# Altium PCB LKS_DEMO_V5.0.PcbDoc (part 4 of 4)
Units mil, origin at the board's own origin, x right, y up, seen from the top; angles counter-clockwise.
Board outline 5414.8 x 3354.56 mil, 2 copper layers (Top Layer, Bottom Layer); 131 components, 85 nets, 355 pads, 272 vias.
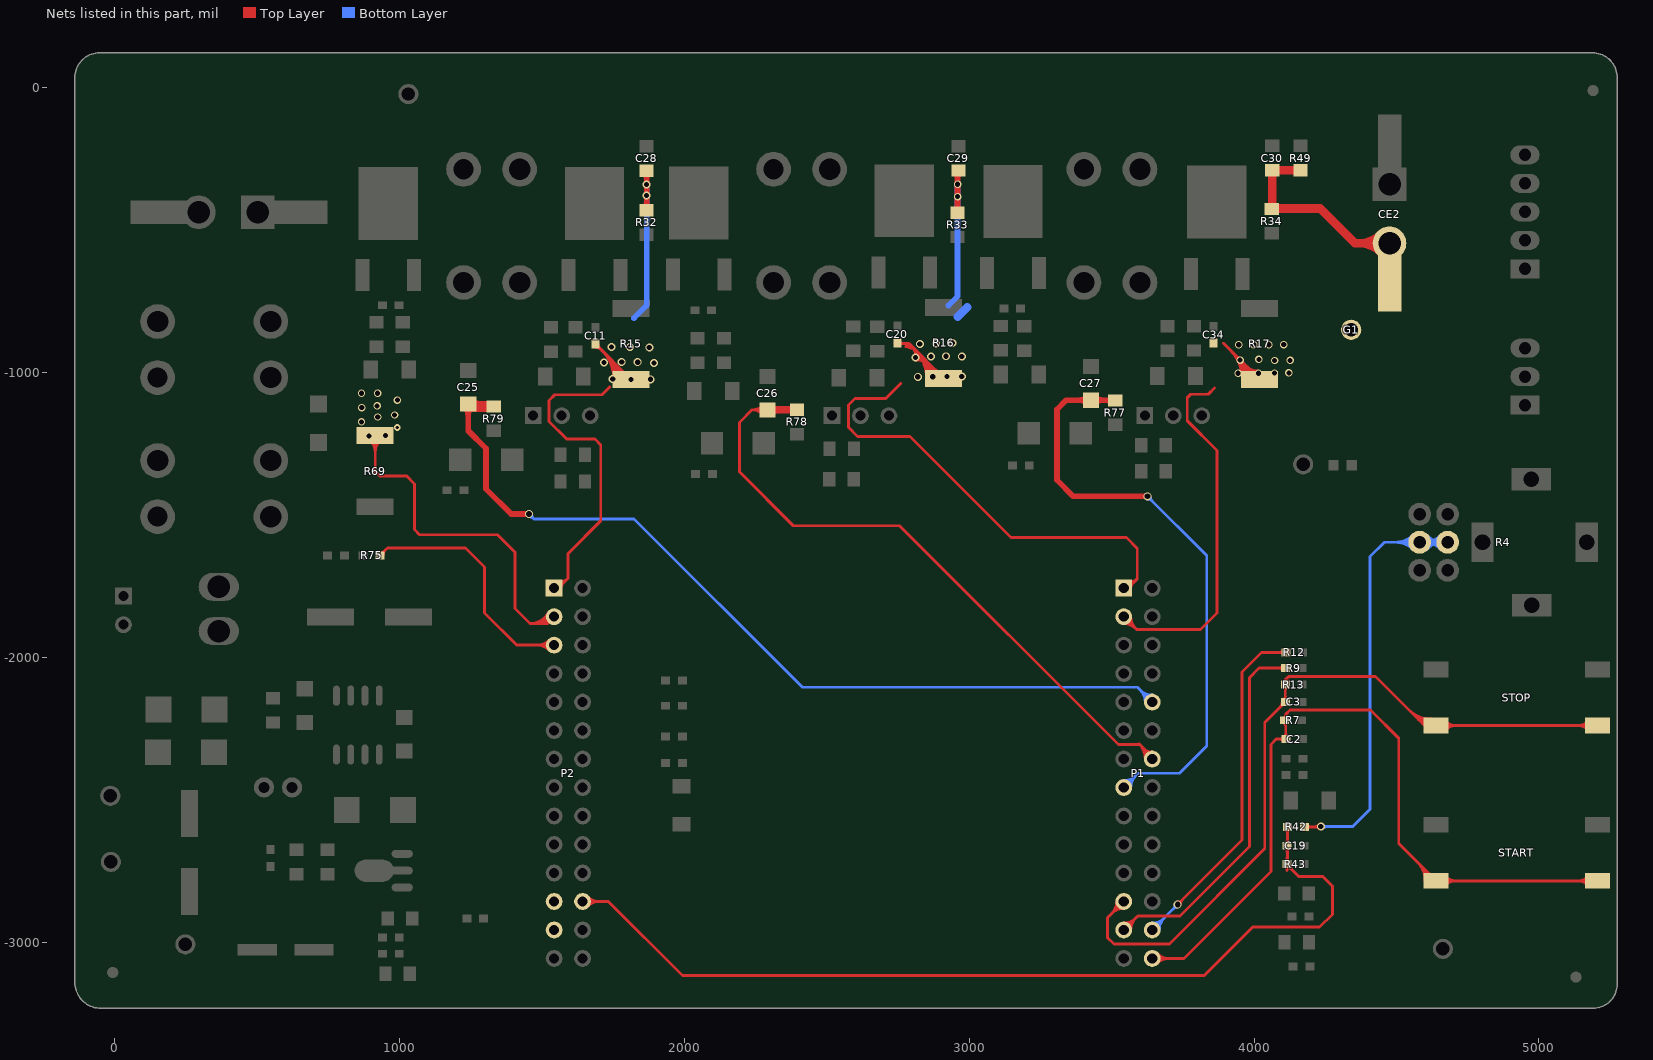
[diagram p4: the nets of this part, all layers, seen from the top]

## Via types
v1: diameter 26, hole 18, Top Layer to Bottom Layer, 117 vias
v2: diameter 28, hole 20, Top Layer to Bottom Layer, 77 vias
v3: diameter 28, hole 18, Top Layer to Bottom Layer, 73 vias
v4: diameter 23.62, hole 11.81, Top Layer to Bottom Layer, 5 vias

## Nets (pads, with @x,y where several pads share a name; then routed paths per layer and width w, separated by ;. In a path a pad name is that pad's centre, name@x,y a point inside that pad or via, vN(x,y) a via of type N, cw(c..) or ccw(c..) an arc to the next point about the centre after c; other vN are vias at no path point) (continued)
PGND: C11.2 C20.2 C28.1 C29.1 C30.1 C34.2 CE2.2 G1.1 P1.1 P1.2 P2.1 P2.2 R15.2 R16.1 R17.2 R32.1 R33.1 R34.1 R49.2 R69.1 | length 13563.9
  Top Layer w10: R69.1@914.27,-1220.9 914.27,-1347.89 930,-1363.63 1025.03,-1363.63 1052.09,-1390.69 1052.09,-1551.41 1070.11,-1569.43 1343.41,-1569.43 1404.57,-1630.58 1404.57,-1827.8 1457.84,-1881.07 1521.32,-1881.07 ; P2.1@1552.3,-1760.99 1590.81,-1722.48 ; C11.2@1686.48,-898.64 v3(1812.36,-1024.52) ; 1737.64,-1050.46 1710.19,-1077.91 1544.55,-1077.91 1524.89,-1097.56 1524.89,-1171.55 1586.49,-1233.15 1685.56,-1233.15 1706.23,-1253.82 1706.23,-1520.42 1590.81,-1635.84 1590.81,-1722.48 ; C20.2@2739.08,-898.48 2788.81,-898.48 R16.1@2909.76,-1019.43 ; 2759.24,-1038.12 2706.6,-1090.75 2598.05,-1090.75 2575.35,-1113.45 2575.35,-1191.92 2607.79,-1224.36 2791.94,-1224.36 3146.77,-1579.2 3551.29,-1579.2 3589.68,-1617.58 3589.68,-1723.64 ; P1.2@3542.25,-1856.82 3587.36,-1901.93 3812,-1901.93 3869.76,-1844.18 3869.76,-1273.79 3765.24,-1169.27 3765.24,-1088.38 3777.42,-1076.19 3838.74,-1076.19 3860.58,-1054.36 ; P1.1@3542.25,-1756.82 3556.5,-1756.82 3589.68,-1723.64 ; 3891.88,-896.92 R17.2@4018.89,-1023.93 ; 914.27,-1280.11 ccw(c855.06,-1280.11) 896.93,-1238.24 cw(c855.06,-1280.11) 914.27,-1280.11 ; 914.27,-1280.11 cw(c973.49,-1280.11) 931.61,-1238.24 ccw(c973.49,-1280.11) 914.27,-1280.11 ; 914.27,-1255.97 ccw(c879.2,-1255.97) 904,-1231.17 cw(c879.2,-1255.97) 914.27,-1255.97 ; 914.27,-1255.97 cw(c949.34,-1255.97) 924.54,-1231.17 ccw(c949.34,-1255.97) 914.27,-1255.97 ; 1590.81,-1722.49 cw(c1560.81,-1692.49) 1549.05,-1733.25 ccw(c1560.81,-1692.49) 1590.81,-1722.49 ; R15.2@1796.99,-1009.15 ccw(c1812.36,-993.79) 1812.36,-1015.52 cw(c1812.36,-993.79) R15.2@1796.99,-1009.15 ; R15.2@1796.99,-1009.15 cw(c1781.63,-1024.52) 1803.36,-1024.52 ccw(c1781.63,-1024.52) R15.2@1796.99,-1009.15 ; 2777.12,-901.14 ccw(c2799.64,-888.13) 2792.91,-913.25 ; 2777.12,-901.14 ccw(c2799.64,-888.13) 2792.91,-913.25 ; 2777.12,-901.14 ccw(c2799.64,-888.13) 2792.91,-913.25 ; 2778.18,-909.31 cw(c2778.18,-961.11) 2814.81,-924.48 ; 2778.18,-909.31 cw(c2778.18,-961.11) 2814.81,-924.48 ; 2778.18,-909.31 cw(c2778.18,-961.11) 2814.81,-924.48 ; 2778.18,-899.31 cw(c2778.18,-926.97) 2797.74,-907.41 ; 2778.18,-899.31 cw(c2778.18,-926.97) 2797.74,-907.41 ; 2778.18,-899.31 cw(c2778.18,-926.97) 2797.74,-907.41 ; 2778.25,-899.31 cw(c2776.95,-920.6) 2795.43,-909.93 ; 2778.25,-899.31 cw(c2776.95,-920.6) 2795.43,-909.93 ; 2778.25,-899.31 cw(c2776.95,-920.6) 2795.43,-909.93 ; 3567.05,-1881.62 ccw(c3542.25,-1906.42) 3542.25,-1871.34 cw(c3542.25,-1906.42) 3567.05,-1881.62 ; 3567.05,-1881.62 cw(c3591.85,-1856.82) 3556.78,-1856.82 ccw(c3591.85,-1856.82) 3567.05,-1881.62 ; 3584.12,-1898.69 ccw(c3542.25,-1940.56) 3542.25,-1881.34 cw(c3542.25,-1940.56) 3584.12,-1898.69 ; 3584.12,-1898.69 cw(c3625.99,-1856.82) 3566.78,-1856.82 ccw(c3625.99,-1856.82) 3584.12,-1898.69 ; 3589.67,-1723.64 cw(c3561.6,-1695.57) 3549.64,-1733.43 ccw(c3561.6,-1695.57) 3589.67,-1723.64 ; 1457.84,-1881.07 ccw(c1457.84,-1808.19) 1521,-1844.57 cw(c1457.84,-1808.19) 1457.84,-1881.07 ; 1475.14,-1881.07 ccw(c1475.14,-1818.16) 1529.66,-1849.56 cw(c1475.14,-1818.16) 1475.14,-1881.07 ; 1492.45,-1881.07 ccw(c1492.45,-1828.13) 1538.33,-1854.56 cw(c1492.45,-1828.13) 1492.45,-1881.07 ; 1509.75,-1881.07 ccw(c1509.75,-1838.09) 1546.99,-1859.55 cw(c1509.75,-1838.09) 1509.75,-1881.07 ; P2.1@1546.28,-1742.86 ccw(c1555.45,-1711.08) 1578.83,-1734.47 cw(c1555.45,-1711.08) P2.1@1546.28,-1742.86 ; P2.1@1566.78,-1756.82 cw(c1591.63,-1756.82) 1574.06,-1739.24 ccw(c1591.63,-1756.82) P2.1@1566.78,-1756.82 ; C11.2@1687.64,-911.18 cw(c1687.64,-938.66) 1707.07,-919.23 ccw(c1687.64,-938.66) C11.2@1687.64,-911.18 ; C11.2@1696.42,-902.4 ccw(c1711.33,-902.4) 1700.78,-912.94 cw(c1711.33,-902.4) C11.2@1696.42,-902.4 ; 1710,-922.16 cw(c1607.64,-1024.52) 1752.4,-1024.52 ccw(c1607.64,-1024.52) 1710,-922.16 ; 1727.07,-939.23 cw(c1641.78,-1024.52) 1762.4,-1024.52 ccw(c1641.78,-1024.52) 1727.07,-939.23 ; 1744.14,-956.3 cw(c1675.92,-1024.52) 1772.4,-1024.52 ccw(c1675.92,-1024.52) 1744.14,-956.3 ; 1761.21,-973.37 cw(c1710.07,-1024.52) 1782.4,-1024.52 ccw(c1710.07,-1024.52) 1761.21,-973.37 ; 1778.28,-990.44 cw(c1744.21,-1024.52) 1792.4,-1024.52 ccw(c1744.21,-1024.52) 1778.28,-990.44 ; C20.2@2753.73,-903.53 cw(c2765.92,-915.73) 2765.92,-898.48 ccw(c2765.92,-915.73) C20.2@2753.73,-903.53 ; C20.2@2753.73,-891.12 ccw(c2771.51,-873.34) 2771.51,-898.48 cw(c2771.51,-873.34) C20.2@2753.73,-891.12 ; 2794.48,-904.15 cw(c2751.96,-946.66) 2812.09,-946.66 ccw(c2751.96,-946.66) 2794.48,-904.15 ; 2806.96,-916.63 cw(c2702.58,-1021) 2850.19,-1021 ccw(c2702.58,-1021) 2806.96,-916.63 ; v3@2811.09,-955.66 cw(c2811.09,-1039.93) 2870.67,-980.34 ccw(c2811.09,-1039.93) v3@2811.09,-955.66 ; v3@2811.09,-945.66 cw(c2811.09,-1005.79) 2853.6,-963.27 ccw(c2811.09,-1005.79) v3@2811.09,-945.66 ; v3@2811.09,-935.66 cw(c2811.09,-971.65) 2836.53,-946.2 ccw(c2811.09,-971.65) v3@2811.09,-935.66 ; 2811.55,-921.22 cw(c2786.1,-946.66) 2822.09,-946.66 ccw(c2786.1,-946.66) 2811.55,-921.22 ; 2824.03,-933.7 cw(c2736.72,-1021) 2860.19,-1021 ccw(c2736.72,-1021) 2824.03,-933.7 ; 2841.1,-950.77 cw(c2770.87,-1021) 2870.19,-1021 ccw(c2770.87,-1021) 2841.1,-950.77 ; 2858.17,-967.84 cw(c2805.01,-1021) 2880.19,-1021 ccw(c2805.01,-1021) 2858.17,-967.84 ; 2875.24,-984.91 cw(c2839.15,-1021) 2890.19,-1021 ccw(c2839.15,-1021) 2875.24,-984.91 ; 2876.27,-985.94 ccw(c2921.84,-940.37) 2921.84,-1004.82 cw(c2921.84,-940.37) 2876.27,-985.94 ; R16.1@2893.34,-1003.01 ccw(c2921.84,-974.51) 2921.84,-1014.82 cw(c2921.84,-974.51) R16.1@2893.34,-1003.01 ; P1.1@3546.63,-1742.96 ccw(c3556.01,-1713.27) 3578.03,-1735.29 cw(c3556.01,-1713.27) P1.1@3546.63,-1742.96 ; P1.1@3566.78,-1756.82 cw(c3591.58,-1756.82) 3574.04,-1739.28 ccw(c3591.58,-1756.82) P1.1@3566.78,-1756.82 ; 3916.32,-921.36 cw(c3813.16,-1024.52) 3959.05,-1024.52 ccw(c3813.16,-1024.52) 3916.32,-921.36 ; 3933.39,-938.43 cw(c3847.31,-1024.52) 3969.05,-1024.52 ccw(c3847.31,-1024.52) 3933.39,-938.43 ; 3936.81,-941.84 cw(c3922.35,-956.3) 3942.8,-956.3 ccw(c3922.35,-956.3) 3936.81,-941.84 ; 3937.94,-942.97 ccw(c3950.8,-930.11) 3950.8,-948.3 cw(c3950.8,-930.11) 3937.94,-942.97 ; v1@3950.47,-955.5 cw(c3881.45,-1024.52) 3979.05,-1024.52 ccw(c3881.45,-1024.52) v1@3950.47,-955.5 ; v1@3950.8,-964.3 cw(c3950.8,-984.74) 3965.25,-970.29 ccw(c3950.8,-984.74) v1@3950.8,-964.3 ; v1@3958.8,-956.3 ccw(c3976.98,-956.3) 3964.12,-969.16 cw(c3976.98,-956.3) v1@3958.8,-956.3 ; 3967.54,-972.57 cw(c3915.59,-1024.52) 3989.05,-1024.52 ccw(c3915.59,-1024.52) 3967.54,-972.57 ; 3971.3,-976.34 ccw(c4015.34,-932.3) 4015.34,-994.58 cw(c4015.34,-932.3) 3971.3,-976.34 ; 3984.61,-989.64 cw(c3949.73,-1024.52) 3999.05,-1024.52 ccw(c3949.73,-1024.52) 3984.61,-989.64 ; 3988.37,-993.41 ccw(c4015.34,-966.44) 4015.34,-1004.58 cw(c4015.34,-966.44) 3988.37,-993.41
  Top Layer w20: R32.1@1866.99,-429.93 C28.1@1866.99,-290.99 ; R33.1@2958.76,-438.55 C29.1@2958.76,-300.89 ; 1866.99,-401.8 ccw(c1895.13,-401.8) 1875.23,-421.69 cw(c1895.13,-401.8) 1866.99,-401.8 ; 1866.99,-401.8 cw(c1838.86,-401.8) 1858.75,-421.69 ccw(c1838.86,-401.8) 1866.99,-401.8 ; 1866.99,-319.13 ccw(c1838.86,-319.13) 1858.75,-299.24 cw(c1838.86,-319.13) 1866.99,-319.13 ; 1866.99,-319.13 cw(c1895.13,-319.13) 1875.23,-299.24 ccw(c1895.13,-319.13) 1866.99,-319.13 ; C29.1@2950.41,-298.91 cw(c2930.24,-319.08) 2958.76,-319.08 ccw(c2930.24,-319.08) C29.1@2950.41,-298.91 ; R33.1@2950.54,-430.33 ccw(c2930.7,-410.49) 2958.76,-410.49 cw(c2930.7,-410.49) R33.1@2950.54,-430.33 ; 2958.76,-410.39 ccw(c2986.97,-410.39) 2967.02,-430.33 cw(c2986.97,-410.39) 2958.76,-410.39 ; 2958.76,-318.53 cw(c2986.5,-318.53) 2966.89,-298.91 ccw(c2986.5,-318.53) 2958.76,-318.53
  Top Layer w30: C30.1@4063.55,-289.6 4063.55,-423.88 4232.02,-423.88 4354.04,-545.9 CE2.2@4475.37,-545.9 ; C30.1@4063.76,-289.81 R49.2@4162.89,-289.81 ; 4369.02,-545.9 ccw(c4369.02,-439.54) 4444.22,-514.74 cw(c4369.02,-439.54) 4369.02,-545.9 ; 4369.02,-545.9 cw(c4369.02,-652.25) 4444.22,-577.05 ccw(c4369.02,-652.25) 4369.02,-545.9
  Bottom Layer w20: 1822.76,-808.82 1866.99,-764.58 v3@1866.99,-342.17 ; 2927,-764.3 2958.81,-732.5 v1(2958.81,-339)
  Bottom Layer w30: 2959.7,-803.54 2993.28,-769.96
  other v1: 892.64,-1222.76 949.94,-1220.9 866.13,-1173.28 922.99,-1156.02 982.37,-1149.02 866.77,-1122.82 921.06,-1117.07 991.96,-1096.63 866.12,-1072.37 922.84,-1072.41 3943.71,-1002.58 4015.34,-1002.58 4071.43,-1001.56 4121.77,-1001.22 4071.77,-957.63 4126.16,-956.96 3950.8,-956.3 4016.35,-953.59 3945.75,-902.24 3998.44,-901.89 4051.83,-902.23 4103.86,-901.89 2958.82,-382.12
  other v3: 1881.29,-1023.49 1747.93,-1022.53 2819.11,-1014.82 2871.72,-1014.82 2921.84,-1013.81 2973.45,-1013.31 1892.32,-966.4 1717.71,-964 1835.72,-963.53 1779.59,-962.57 2811.09,-946.66 2865.21,-943.66 2973.45,-943.15 2918.33,-942.65 1876.49,-912.2 1744.1,-910.76 1807.89,-910.28 2826.12,-899.06 2882.75,-898.05 2940.38,-896.55 1866.99,-378.39 1866.99,-339.36
  other v4: 991.83,-1192.69
RXD0: P1.13 R9.1 | length 1658
  Top Layer w10: P1.13@3542.25,-2956.82 3591.58,-2907.48 3739.73,-2907.48 3983.31,-2663.9 3983.31,-2071.55 4017.54,-2037.33 R9.1@4109.61,-2037.33 ; 3567.05,-2932.02 ccw(c3591.85,-2956.82) 3556.78,-2956.82 cw(c3591.85,-2956.82) 3567.05,-2932.02 ; 3567.05,-2932.02 cw(c3542.25,-2907.22) 3542.25,-2942.29 ccw(c3542.25,-2907.22) 3567.05,-2932.02 ; 3584.12,-2914.94 ccw(c3625.99,-2956.82) 3566.78,-2956.82 cw(c3625.99,-2956.82) 3584.12,-2914.94 ; 3584.12,-2914.94 cw(c3542.25,-2873.07) 3542.25,-2932.29 ccw(c3542.25,-2873.07) 3584.12,-2914.94 ; 4086.45,-2037.33 ccw(c4086.45,-2016.13) 4101.44,-2031.12 cw(c4086.45,-2016.13) 4086.45,-2037.33 ; 4086.45,-2037.33 cw(c4086.45,-2058.52) 4101.44,-2043.54 ccw(c4086.45,-2058.52) 4086.45,-2037.33
RXD1: P2.12
SPIN: C19.2 P2.26 R42.2 R43.2 | length 3870.8
  Top Layer w10: P2.26@1642.25,-2856.82 1732.3,-2856.82 1992.58,-3117.09 3825.04,-3117.09 3995.12,-2947.01 4229.81,-2947.01 4274.61,-2902.21 4274.61,-2803.4 4240.64,-2769.43 4156.27,-2769.43 R43.2@4115.46,-2728.62 ; R43.2@4109.02,-2731.94 cw(c4092.77,-2748.18) 4115.74,-2748.18 ; R43.2@4109.02,-2719.52 ccw(c4092.77,-2703.28) 4115.74,-2703.28 ; R42.2@4109.34,-2600.99 cw(c4092.05,-2618.27) 4116.49,-2618.27 ; C19.2@4109.54,-2655.11 ccw(c4092.74,-2638.32) 4116.49,-2638.32 ; R43.2@4110.98,-2719.52 ccw(c4097.68,-2706.22) 4116.49,-2706.22 ; R43.2@4111.22,-2722.41 ccw(c4098.48,-2709.68) 4116.49,-2709.68 ; 4115.74,-2745.67 cw(c4135.16,-2745.67) R43.2@4121.43,-2731.94 ; 4115.74,-2705.79 ccw(c4135.16,-2705.79) R43.2@4121.43,-2719.52 ; R43.2@4116.49,-2728.62 R42.2@4116.49,-2597.15 ; 4116.49,-2705.17 ccw(c4140.87,-2705.17) R43.2@4123.63,-2722.41 ; 4116.49,-2702.85 ccw(c4140.07,-2702.85) R43.2@4123.4,-2719.52 ; 4116.49,-2684.33 ccw(c4092.74,-2684.33) 4109.54,-2667.53 cw(c4094.55,-2682.52) 4115.74,-2682.52 cw(c4136.94,-2682.52) 4121.95,-2667.53 ccw(c4135.13,-2680.71) 4116.49,-2680.71 ; 4116.49,-2641.94 ccw(c4135.13,-2641.94) C19.2@4121.95,-2655.11 ; 4116.49,-2613.68 cw(c4134.44,-2613.68) R42.2@4121.75,-2600.99 ; R43.2@4117.43,-2737.4 cw(c4117.43,-2753.84) 4129.05,-2742.22 ; R43.2@4125.97,-2725.73 ccw(c4158.33,-2725.73) 4135.45,-2748.61 ; R43.2@4126.21,-2728.62 ccw(c4152.15,-2728.62) 4133.81,-2746.97 ; 1677.32,-2856.82 ccw(c1677.32,-2891.89) 1652.52,-2867.09 cw(c1677.32,-2891.89) 1677.32,-2856.82 ; 1677.32,-2856.82 cw(c1677.32,-2821.74) 1652.52,-2846.54 ccw(c1677.32,-2821.74) 1677.32,-2856.82 ; 1701.46,-2856.82 ccw(c1701.46,-2916.03) 1659.59,-2874.16 cw(c1701.46,-2916.03) 1701.46,-2856.82 ; 1701.46,-2856.82 cw(c1701.46,-2797.6) 1659.59,-2839.47 ccw(c1701.46,-2797.6) 1701.46,-2856.82
START1: C2.2 P1.28 R7.2 START.2 START.4 | length 4050.8
  Top Layer w10: P1.28@3642.25,-3056.82 3753.28,-3056.82 4058.77,-2751.32 4058.77,-2305.73 4077.8,-2286.71 C2.2@4110.99,-2286.71 4110.99,-2199.48 ; START.2@4619,-2785.42 START.4@5183.95,-2785.42 ; START.2@4638.66,-2784.03 4507.7,-2653.07 4507.7,-2283.96 4408.4,-2184.67 4125.8,-2184.67 4110.99,-2199.48 ; 3677.32,-3056.82 ccw(c3677.32,-3091.89) 3652.52,-3067.09 cw(c3677.32,-3091.89) 3677.32,-3056.82 ; 3677.32,-3056.82 cw(c3677.32,-3021.74) 3652.52,-3046.54 ccw(c3677.32,-3021.74) 3677.32,-3056.82 ; 3701.46,-3056.82 ccw(c3701.46,-3116.03) 3659.59,-3074.16 cw(c3701.46,-3116.03) 3701.46,-3056.82 ; 3701.46,-3056.82 cw(c3701.46,-2997.6) 3659.59,-3039.47 ccw(c3701.46,-2997.6) 3701.46,-3056.82 ; 4087.82,-2286.71 ccw(c4087.82,-2265.51) 4102.81,-2280.5 cw(c4087.82,-2265.51) 4087.82,-2286.71 ; 4087.82,-2286.71 cw(c4087.82,-2307.9) 4102.81,-2292.92 ccw(c4087.82,-2307.9) 4087.82,-2286.71 ; 4110.99,-2265.51 ccw(c4132.18,-2265.51) 4117.2,-2280.5 cw(c4132.18,-2265.51) 4110.99,-2265.51 ; 4110.99,-2265.51 cw(c4089.79,-2265.51) 4104.78,-2280.5 ccw(c4089.79,-2265.51) 4110.99,-2265.51 ; 4110.99,-2199.48 cw(c4092.87,-2199.48) 4103.89,-2213.86 ccw(c4092.87,-2199.48) 4110.99,-2199.48 ; R7.2@4103.02,-2227.04 cw(c4083.79,-2246.27) 4110.99,-2246.27 ccw(c4083.79,-2246.27) R7.2@4103.02,-2227.04 ; 4110.99,-2237.78 cw(c4126.18,-2237.78) 4115.44,-2227.04 ccw(c4126.18,-2237.78) 4110.99,-2237.78 ; 4110.99,-2203.88 ccw(c4126.18,-2203.88) 4115.44,-2214.62 cw(c4126.18,-2203.88) 4110.99,-2203.88 ; 4573.27,-2718.63 cw(c4507.87,-2784.03) 4600.35,-2784.03 ccw(c4507.87,-2784.03) 4573.27,-2718.63 ; 4590.34,-2735.7 cw(c4542.01,-2784.03) 4610.35,-2784.03 ccw(c4542.01,-2784.03) 4590.34,-2735.7 ; 4607.41,-2752.78 cw(c4576.16,-2784.03) 4620.35,-2784.03 ccw(c4576.16,-2784.03) 4607.41,-2752.78 ; START.2@4611.43,-2756.8 ccw(c4622.85,-2745.37) 4622.85,-2761.53 cw(c4622.85,-2745.37) START.2@4611.43,-2756.8 ; START.2@4663.31,-2775.19 ccw(c4688.01,-2750.48) 4688.01,-2785.42 cw(c4688.01,-2750.48) START.2@4663.31,-2775.19 ; START.2@4670.38,-2799.94 cw(c4705.42,-2834.98) 4705.42,-2785.42 ccw(c4705.42,-2834.98) START.2@4670.38,-2799.94 ; START.2@4670.38,-2768.12 ccw(c4712.16,-2726.34) 4712.16,-2785.42 cw(c4712.16,-2726.34) START.2@4670.38,-2768.12 ; 5132.09,-2785.42 ccw(c5132.09,-2726.34) 5173.87,-2768.12 cw(c5132.09,-2726.34) 5132.09,-2785.42 ; 5138.83,-2785.42 cw(c5138.83,-2834.98) 5173.87,-2799.94 ccw(c5138.83,-2834.98) 5138.83,-2785.42 ; 5156.23,-2785.42 ccw(c5156.23,-2750.48) 5180.94,-2775.19 cw(c5156.23,-2750.48) 5156.23,-2785.42
STOP1: C3.1 P1.12 R13.1 STOP.2 STOP.4 | length 4296.6
  Top Layer w10: P1.12@3542.25,-2856.82 3484.5,-2914.57 3484.5,-2983.05 3507.44,-3005.98 3702.22,-3005.98 4036.94,-2671.26 4036.94,-2228.44 C3.1@4109.35,-2156.04 R13.1@4109.35,-2095.34 4109.35,-2077.64 ; STOP.2@4617.02,-2258.15 4425.57,-2066.7 4120.28,-2066.7 ; STOP.2@4617.02,-2239 STOP.4@5183.95,-2239 ; 3500.38,-2898.69 ccw(c3458.51,-2856.82) 3517.72,-2856.82 cw(c3458.51,-2856.82) 3500.38,-2898.69 ; 3500.38,-2898.69 cw(c3542.25,-2940.56) 3542.25,-2881.34 ccw(c3542.25,-2940.56) 3500.38,-2898.69 ; 3517.45,-2881.62 ccw(c3492.65,-2856.82) 3527.72,-2856.82 cw(c3492.65,-2856.82) 3517.45,-2881.62 ; 3517.45,-2881.62 cw(c3542.25,-2906.42) 3542.25,-2871.34 ccw(c3542.25,-2906.42) 3517.45,-2881.62 ; 4109.35,-2134.85 ccw(c4130.54,-2134.85) 4115.55,-2149.83 cw(c4130.54,-2134.85) 4109.35,-2134.85 ; 4109.35,-2134.85 cw(c4088.15,-2134.85) 4103.14,-2149.83 ccw(c4088.15,-2134.85) 4109.35,-2134.85 ; 4109.35,-2116.54 ccw(c4088.15,-2116.54) 4103.14,-2101.55 cw(c4088.15,-2116.54) 4109.35,-2116.54 ; 4109.35,-2116.54 cw(c4130.54,-2116.54) 4115.55,-2101.55 ccw(c4130.54,-2116.54) 4109.35,-2116.54 ; 4109.35,-2077.64 ccw(c4122.81,-2077.64) 4114.66,-2088.35 cw(c4122.81,-2077.64) 4109.35,-2077.64 ; 4109.34,-2077.64 cw(c4095.88,-2077.64) 4104.03,-2088.35 ccw(c4095.88,-2077.64) 4109.34,-2077.64 ; 4109.35,-2077.64 4120.28,-2066.7 ; 4120.28,-2066.7 ccw(c4133.11,-2079.53) 4118.42,-2090.19 cw(c4133.11,-2079.53) 4120.28,-2066.7 ; 4091,-2174.39 ccw(c4072.65,-2156.04) 4098.6,-2156.04 cw(c4072.65,-2156.04) 4091,-2174.39 ; C3.1@4095.75,-2169.64 cw(c4107.38,-2181.27) 4107.38,-2164.82 ccw(c4107.38,-2181.27) C3.1@4095.75,-2169.64 ; R13.1@4110.33,-2096.06 cw(c4123.51,-2086.5) 4111.99,-2074.99 ccw(c4123.51,-2086.5) R13.1@4110.33,-2096.06 ; 4542.1,-2183.23 ccw(c4622.85,-2102.47) 4622.85,-2216.68 cw(c4622.85,-2102.47) 4542.1,-2183.23 ; 4559.17,-2200.3 ccw(c4622.85,-2136.61) 4622.85,-2226.68 cw(c4622.85,-2136.61) 4559.17,-2200.3 ; 4576.24,-2217.37 ccw(c4622.85,-2170.76) 4622.85,-2236.68 cw(c4622.85,-2170.76) 4576.24,-2217.37 ; 4593.31,-2234.44 ccw(c4622.85,-2204.9) 4622.85,-2246.68 cw(c4622.85,-2204.9) 4593.31,-2234.44 ; STOP.2@4663.31,-2248.02 cw(c4685.08,-2269.79) 4685.08,-2239 ccw(c4685.08,-2269.79) STOP.2@4663.31,-2248.02 ; STOP.2@4663.31,-2230.34 ccw(c4684.21,-2209.43) 4684.21,-2239 cw(c4684.21,-2209.43) STOP.2@4663.31,-2230.34 ; STOP.2@4670.38,-2255.09 cw(c4709.22,-2293.93) 4709.22,-2239 ccw(c4709.22,-2293.93) STOP.2@4670.38,-2255.09 ; STOP.2@4670.38,-2223.27 ccw(c4708.35,-2185.29) 4708.35,-2239 cw(c4708.35,-2185.29) STOP.2@4670.38,-2223.27 ; 5135.03,-2239 cw(c5135.03,-2293.93) 5173.87,-2255.09 ccw(c5135.03,-2293.93) 5135.03,-2239 ; 5135.89,-2239 ccw(c5135.89,-2185.29) 5173.87,-2223.27 cw(c5135.89,-2185.29) 5135.89,-2239 ; 5159.17,-2239 cw(c5159.17,-2269.79) 5180.94,-2248.02 ccw(c5159.17,-2269.79) 5159.17,-2239 ; 5160.04,-2239 ccw(c5160.04,-2209.43) 5180.94,-2230.34 cw(c5160.04,-2209.43) 5160.04,-2239
TXD0: P1.27 R12.2 | length 1717.5
  Top Layer w10: v2(3731.35,-2867.74) 3957.86,-2641.22 3957.86,-2050.75 4026.14,-1982.47 R12.2@4110.99,-1982.47 ; 3746.71,-2852.37 ccw(c3762.07,-2867.74) 3740.35,-2867.74 cw(c3762.07,-2867.74) 3746.71,-2852.37 ; 3746.71,-2852.37 cw(c3731.35,-2837.01) 3731.35,-2858.74 ccw(c3731.35,-2837.01) 3746.71,-2852.37 ; 4087.82,-1982.47 ccw(c4087.82,-1961.28) 4102.81,-1976.27 cw(c4087.82,-1961.28) 4087.82,-1982.47 ; 4087.82,-1982.47 cw(c4087.82,-2003.67) 4102.81,-1988.68 ccw(c4087.82,-2003.67) 4087.82,-1982.47
  Bottom Layer w10: P1.27@3642.25,-2956.82 v2(3731.35,-2867.74) ; 3667.05,-2932.02 ccw(c3691.85,-2956.82) 3656.78,-2956.82 cw(c3691.85,-2956.82) 3667.05,-2932.02 ; 3667.05,-2932.02 cw(c3642.25,-2907.22) 3642.25,-2942.29 ccw(c3642.25,-2907.22) 3667.05,-2932.02 ; 3684.12,-2914.94 ccw(c3725.99,-2956.82) 3666.78,-2956.82 cw(c3725.99,-2956.82) 3684.12,-2914.94 ; 3684.12,-2914.94 cw(c3642.25,-2873.07) 3642.25,-2932.29 ccw(c3642.25,-2873.07) 3684.12,-2914.94 ; 3715.95,-2883.11 cw(c3731.35,-2898.51) 3731.35,-2876.74 ccw(c3731.35,-2898.51) 3715.95,-2883.11 ; 3715.99,-2883.07 ccw(c3700.66,-2867.74) 3722.35,-2867.74 cw(c3700.66,-2867.74) 3715.99,-2883.07
TXD1: P2.13
VB1: C27.1 P1.8 R77.1 | length 2834.8
  Top Layer w20: R77.1@3511.39,-1097.1 C27.1@3427.06,-1097.1 3339.81,-1097.1 3307.7,-1129.21 3307.7,-1377.36 3364.86,-1434.52 v2(3625.43,-1434.52) ; 3385.07,-1097.1 ccw(c3385.07,-1057.08) 3413.37,-1085.38 cw(c3385.07,-1057.08) 3385.07,-1097.1 ; 3385.07,-1097.1 cw(c3385.07,-1137.11) 3413.37,-1108.82 ccw(c3385.07,-1137.11) 3385.07,-1097.1 ; 3469.04,-1097.1 ccw(c3469.04,-1137.11) 3440.74,-1108.82 cw(c3469.04,-1137.11) 3469.04,-1097.1 ; 3469.04,-1097.1 cw(c3469.04,-1057.08) 3440.74,-1085.38 ccw(c3469.04,-1057.08) 3469.04,-1097.1 ; 3478.84,-1097.1 cw(c3478.84,-1127.82) 3500.57,-1106.1 ccw(c3478.84,-1127.82) 3478.84,-1097.1 ; 3482.5,-1097.1 ccw(c3482.5,-1071.55) 3500.57,-1089.61 cw(c3482.5,-1071.55) 3482.5,-1097.1
  Bottom Layer w10: P1.8@3542.25,-2456.82 3592.55,-2406.52 3737.86,-2406.52 3833.52,-2310.86 3833.52,-1642.63 v2@3618.59,-1427.7 ; 3567.05,-2432.02 ccw(c3591.85,-2456.82) 3556.78,-2456.82 cw(c3591.85,-2456.82) 3567.05,-2432.02 ; 3567.05,-2432.02 cw(c3542.25,-2407.22) 3542.25,-2442.29 ccw(c3542.25,-2407.22) 3567.05,-2432.02 ; 3584.12,-2414.94 ccw(c3625.99,-2456.82) 3566.78,-2456.82 cw(c3625.99,-2456.82) 3584.12,-2414.94 ; 3584.12,-2414.94 cw(c3542.25,-2373.07) 3542.25,-2432.29 ccw(c3542.25,-2373.07) 3584.12,-2414.94 ; v2@3625.43,-1443.52 cw(c3625.43,-1465.2) 3640.77,-1449.87 ccw(c3625.43,-1465.2) v2@3625.43,-1443.52 ; v2@3634.43,-1434.52 ccw(c3656.21,-1434.52) 3640.81,-1449.92 cw(c3656.21,-1434.52) v2@3634.43,-1434.52
VB2: C26.1 P1.21 R78.1 | length 2902.4
  Top Layer w10: C26.1@2290.6,-1130.53 2237.61,-1130.53 ; P1.21@3639.99,-2347.67 3598.55,-2306.24 3523.56,-2306.24 2754.81,-1537.49 2382.07,-1537.49 2192.67,-1348.1 2192.67,-1175.46 2237.61,-1130.53 ; 2237.61,-1130.53 cw(c2237.61,-1180.19) 2273.97,-1146.36 ccw(c2237.61,-1180.19) 2237.61,-1130.53 ; 2240.41,-1130.53 ccw(c2240.41,-1082.31) 2274.51,-1116.41 cw(c2240.41,-1082.31) 2240.41,-1130.53 ; 2260.58,-1130.53 cw(c2260.58,-1158.82) 2281.29,-1139.55 ccw(c2260.58,-1158.82) 2260.58,-1130.53 ; 3595.51,-2303.2 cw(c3541.89,-2356.82) 3617.72,-2356.82 ccw(c3541.89,-2356.82) 3595.51,-2303.2 ; 3612.12,-2319.81 ccw(c3642.25,-2289.69) 3642.25,-2332.29 cw(c3642.25,-2289.69) 3612.12,-2319.81 ; 3612.58,-2320.27 cw(c3576.04,-2356.82) 3627.72,-2356.82 ccw(c3576.04,-2356.82) 3612.58,-2320.27
  Top Layer w25: C26.1@2290.6,-1130.53 R78.1@2395.27,-1130.53 ; 2369.82,-1130.53 ccw(c2369.82,-1108.43) 2385.45,-1124.06 cw(c2369.82,-1108.43) 2369.82,-1130.53 ; 2369.82,-1130.53 cw(c2369.82,-1152.63) 2385.45,-1137 ccw(c2369.82,-1152.63) 2369.82,-1130.53 ; C26.1@2303.65,-1141.61 cw(c2330.42,-1168.38) 2330.42,-1130.53 ccw(c2330.42,-1168.38) C26.1@2303.65,-1141.61 ; C26.1@2303.65,-1121.71 ccw(c2324.94,-1100.42) 2324.94,-1130.53 cw(c2324.94,-1100.42) C26.1@2303.65,-1121.71
VB3: C25.1 P1.19 R79.1 | length 3612.3
  Top Layer w20: C25.1@1240.79,-1110.76 1240.79,-1204.1 1303.28,-1266.58 1303.28,-1408.18 1391.82,-1496.73 v2(1454.04,-1496.74) ; 1240.79,-1150.77 ccw(c1200.78,-1150.77) 1229.07,-1122.48 cw(c1200.78,-1150.77) 1240.79,-1150.77 ; 1240.79,-1150.77 cw(c1280.81,-1150.77) 1252.51,-1122.48 ccw(c1280.81,-1150.77) 1240.79,-1150.77
  Top Layer w40: C25.1@1248.97,-1118.93 R79.1@1329.96,-1118.93 ; C25.1@1247.41,-1106.11 ccw(c1278.38,-1075.14) 1278.38,-1118.93 cw(c1278.38,-1075.14) C25.1@1247.41,-1106.11
  Bottom Layer w10: v2(1454.04,-1496.74) 1471.17,-1513.88 1823.28,-1513.88 2414.23,-2104.82 3590.26,-2104.82 P1.19@3642.25,-2156.82 ; 1469.4,-1512.1 ccw(c1454.04,-1527.47) 1454.04,-1505.74 cw(c1454.04,-1527.47) 1469.4,-1512.1 ; 1469.4,-1512.1 cw(c1484.76,-1496.74) 1463.04,-1496.74 ccw(c1484.76,-1496.74) 1469.4,-1512.1 ; 3600.38,-2114.94 ccw(c3642.25,-2073.07) 3642.25,-2132.29 cw(c3642.25,-2073.07) 3600.38,-2114.94 ; 3600.38,-2114.94 cw(c3558.51,-2156.82) 3617.72,-2156.82 ccw(c3558.51,-2156.82) 3600.38,-2114.94 ; 3617.45,-2132.02 ccw(c3642.25,-2107.22) 3642.25,-2142.29 cw(c3642.25,-2107.22) 3617.45,-2132.02 ; 3617.45,-2132.02 cw(c3592.65,-2156.82) 3627.72,-2156.82 ccw(c3592.65,-2156.82) 3617.45,-2132.02
VOL_ADC: P2.3 R75.2 | length 1221.5
  Top Layer w10: R75.2@930.89,-1641.8 957.3,-1615.38 1231.56,-1615.38 1298.35,-1682.17 1298.35,-1844.31 1410.85,-1956.82 P2.3@1542.25,-1956.82 ; 1483.03,-1956.82 ccw(c1483.03,-1897.6) 1524.91,-1939.47 cw(c1483.03,-1897.6) 1483.03,-1956.82 ; 1483.03,-1956.82 cw(c1483.03,-2016.03) 1524.91,-1974.16 ccw(c1483.03,-2016.03) 1483.03,-1956.82 ; 1507.18,-1956.82 ccw(c1507.18,-1921.74) 1531.98,-1946.54 cw(c1507.18,-1921.74) 1507.18,-1956.82 ; 1507.18,-1956.82 cw(c1507.18,-1991.89) 1531.98,-1967.09 ccw(c1507.18,-1991.89) 1507.18,-1956.82 ; R75.2@932.86,-1633.02 ccw(c932.86,-1616.57) 944.49,-1628.2 cw(c932.86,-1616.57) R75.2@932.86,-1633.02 ; R75.2@941.64,-1641.8 cw(c967.59,-1641.8) 949.24,-1623.45 ccw(c967.59,-1641.8) R75.2@941.64,-1641.8
ZB: R4.3 R4.5 R42.1 | length 2902.3
  Top Layer w10: R42.1@4176.57,-2594.78 v3@4233.23,-2594.78 ; R42.1@4184.74,-2600.99 cw(c4199.73,-2615.97) 4199.73,-2594.78 cw(c4199.73,-2573.58) R42.1@4184.74,-2588.57 ; 4210.44,-2594.78 ccw(c4210.44,-2570.48) v3@4227.62,-2587.66 ; 4214.07,-2594.78 cw(c4214.07,-2613.94) v3@4227.62,-2600.39
  Bottom Layer w10: v3(4233.99,-2594.03) 4346.2,-2594.03 4407.22,-2533.01 4407.22,-1645.54 4457.1,-1595.66 R4.5@4679.48,-1595.66 ; v3@4240.35,-2600.39 cw(c4255.71,-2615.75) 4255.71,-2594.03 cw(c4255.71,-2572.3) v3@4240.35,-2587.66 ; 4496.56,-1595.66 ccw(c4496.56,-1511.16) 4556.31,-1570.91 cw(c4496.56,-1511.16) 4496.56,-1595.66 ; 4496.56,-1595.66 cw(c4496.56,-1680.16) 4556.31,-1620.41 ccw(c4496.56,-1680.16) 4496.56,-1595.66 ; 4520.7,-1595.66 ccw(c4520.7,-1535.3) 4563.38,-1577.98 cw(c4520.7,-1535.3) 4520.7,-1595.66 ; 4520.7,-1595.66 cw(c4520.7,-1656.02) 4563.38,-1613.34 ccw(c4520.7,-1656.02) 4520.7,-1595.66 ; R4.3@4594.98,-1595.66 ccw(c4594.98,-1511.16) 4654.73,-1570.91 cw(c4594.98,-1511.16) R4.3@4594.98,-1595.66 ; R4.3@4594.98,-1595.66 cw(c4594.98,-1680.16) 4654.73,-1620.41 ccw(c4594.98,-1680.16) R4.3@4594.98,-1595.66 ; R4.3@4619.12,-1595.66 ccw(c4619.12,-1535.3) 4661.8,-1577.98 cw(c4619.12,-1535.3) R4.3@4619.12,-1595.66 ; R4.3@4619.12,-1595.66 cw(c4619.12,-1656.02) 4661.8,-1613.34 ccw(c4619.12,-1656.02) R4.3@4619.12,-1595.66 ; R4.5@4641.41,-1595.66 ccw(c4641.41,-1656.02) 4598.73,-1613.34 cw(c4641.41,-1656.02) R4.5@4641.41,-1595.66 ; R4.5@4641.41,-1595.66 cw(c4641.41,-1535.3) 4598.73,-1577.98 ccw(c4641.41,-1535.3) R4.5@4641.41,-1595.66 ; R4.5@4665.55,-1595.66 ccw(c4665.55,-1680.16) 4605.8,-1620.41 cw(c4665.55,-1680.16) R4.5@4665.55,-1595.66 ; R4.5@4665.55,-1595.66 cw(c4665.55,-1511.16) 4605.8,-1570.91 ccw(c4665.55,-1511.16) R4.5@4665.55,-1595.66
pads on no net: R4.0

## Polygon pours and split planes (outlines as drawn)
PGND on Top Layer "Bottom Layer-No Net" (solid, remove dead copper, pour order 85): 4233.08,-503.67 4579.06,-503.67 4607.57,-532.18 4618.36,-542.97 4618.36,-835.01 4618.36,-837.32 4448.84,-1006.84 4266.98,-1006.84 4230,-1006.84
GND on Top Layer "Bottom Layer-No Net" (solid, remove dead copper, pour order 82): 616.46,-1697.87 610.61,-1704.31 610.61,-1788.02 610.61,-1918.11 619.37,-1927.78 646.78,-1958.05 800.76,-1958.05 866.67,-1958.05 877.17,-1946.46 889.99,-1932.3 889.99,-1696.59
NetCF1_1 on Top Layer "Bottom Layer-No Net" (solid, remove dead copper, pour order 78): 894.61,-1772.34 902.96,-1763.61 1123.41,-1763.61 1123.41,-2120.67 1096.41,-2148.86 1093.84,-2151.54 969.14,-2151.54 969.14,-2053.57 969.79,-2052.89 967.22,-2050.2 896.53,-2050.2 896.53,-1765.24 894.39,-1763.01
+48V on Top Layer "Bottom Layer-No Net" (solid, remove dead copper, pour order 91): 512.88,84.23 505.13,84.23 474.13,53.23 472.58,51.68 472.58,-283.09 472.58,-424.13 395.09,-501.62 155.6,-741.11 155.6,-820.65 155.6,-1074.27 173.45,-1092.13 178.1,-1096.78 512.88,-1096.78 711.26,-1096.78 731.41,-1076.63 756.21,-1051.83 756.21,-1013.08 756.21,-558.97 801.15,-514.02 804.26,-517.13 901.89,-517.13 1021.23,-517.13 1056.89,-481.47 1064.63,-473.72 1064.63,-272.24 1064.63,-196.3 1112.68,-148.25 1371.51,-148.25 1817.87,-148.25 1856.62,-187 1962.01,-292.39 1962.01,-362.13 2130.95,-362.13 2134.05,-359.04 2148,-345.09 2148,-253.64 2148,-227.3 2177.45,-197.85 2227.04,-148.25 2377.38,-148.25 2932.24,-148.25 2975.63,-191.65 3054.68,-270.69 3054.68,-340.44 3062.43,-340.44 3085.68,-363.68 3088.77,-366.78 3223.61,-366.78 3240.66,-366.78 3248.41,-359.03 3248.41,-279.99 3248.41,-200.95 3288.71,-160.65 3293.36,-156 3939.66,-156 4000.1,-156 4045.05,-200.95 4046.6,-199.4 4220.19,-199.4 4248.09,-199.4 4272.88,-224.2 4324.03,-275.34 4324.03,-303.24 4324.03,-338.89 4339.53,-354.39 4344.17,-359.03 4643.31,-359.03 4665.01,-359.03 4691.35,-332.69 4691.34,-332.68 4691.34,36.18 4691.34,68.74 4610.76,149.32
GND on Top Layer "Bottom Layer-No Net" (solid, remove dead copper, pour order 95): 135.26,-1248.11 85.24,-1198.09 85.24,-1056.74 85.24,-591.37 158.08,-518.53 310.31,-366.3 310.31,-272.79 310.31,-230.39 275.52,-195.59 261.38,-181.46 80.89,-181.46 -13.71,-181.46 -88.73,-256.48 -121.35,-289.1 -121.35,-1249.2
GND on Top Layer "Bottom Layer-No Net" (solid, remove dead copper, pour order 105): 787.74,-2679.11 777.5,-2689.35 777.5,-2826.88 1228.84,-2826.88 1274.92,-2780.79 1286.62,-2769.09 1286.62,-2647.66 803.1,-2647.66 783.35,-2667.41
GND on Top Layer "Bottom Layer-No Net" (solid, remove dead copper, pour order 104): 916.55,-1427.29 920.84,-1427.29 974.03,-1482.9 982.61,-1491.87 982.61,-1566.3 982.61,-1572.58 968.02,-1587.82 967.17,-1586.93 600.02,-1586.93 -89.68,-1586.93 -182.32,-1490.07 -117.97,-1422.8 -117.97,-1296.35 -117.97,-1241.64 -108.54,-1231.78 -100.83,-1223.71 650.63,-1223.71 683.24,-1223.71 700.39,-1241.64 725.26,-1267.64 725.26,-1404.87 725.26,-1425.5 724.4,-1426.4
AX on Top Layer "Bottom Layer-No Net" (solid, remove dead copper, pour order 103): 1160.61,-219.63 1129.04,-251.2 1129.04,-277.03 1129.04,-559.01 1093.88,-594.17 1061.59,-626.45 1061.59,-658.02 1061.59,-701.79 1067.33,-707.53 1107.51,-747.71 1388.77,-747.71 1479.18,-747.71 1497.83,-729.05 1503.57,-723.31 1503.57,-640.8 1503.57,-598.47 1517.19,-584.85 1527.24,-574.8 1604.01,-574.8 1652.8,-574.8 1682.23,-545.38 1687.97,-539.64 1687.97,-337.3 1687.97,-277.75 1680.07,-269.86 1662.85,-252.64 1489.22,-252.64 1456.93,-252.64 1423.21,-218.92
BX on Top Layer "Bottom Layer-No Net" (solid, remove dead copper, pour order 102): 2248.2,-218.21 2216.63,-249.78 2216.63,-275.61 2216.63,-557.59 2181.47,-592.74 2149.18,-625.03 2149.18,-656.6 2149.18,-700.37 2154.92,-706.11 2195.1,-746.29 2476.36,-746.29 2566.77,-746.29 2585.42,-727.63 2591.16,-721.89 2591.16,-639.38 2591.16,-597.05 2604.78,-583.43 2614.83,-573.38 2691.6,-573.38 2740.39,-573.38 2769.82,-543.95 2775.56,-538.22 2775.56,-335.88 2775.56,-276.33 2767.66,-268.44 2750.44,-251.22 2576.81,-251.22 2544.52,-251.22 2510.8,-217.49
CX on Top Layer "Bottom Layer-No Net" (solid, remove dead copper, pour order 101): 3351.02,-205.56 3319.44,-237.13 3319.44,-262.96 3319.44,-544.94 3284.29,-580.09 3252,-612.38 3252,-643.95 3252,-687.72 3257.74,-693.46 3297.92,-733.64 3579.18,-733.64 3669.58,-733.64 3688.24,-714.98 3693.98,-709.24 3693.98,-626.73 3693.98,-584.4 3707.6,-570.77 3717.65,-560.73 3794.42,-560.73 3843.21,-560.73 3872.63,-531.3 3878.37,-525.56 3878.37,-323.23 3878.37,-263.68 3870.48,-255.78 3853.26,-238.56 3679.63,-238.56 3647.34,-238.56 3613.62,-204.84
PGND on Top Layer "Bottom Layer-No Net" (solid, remove dead copper, pour order 97): 831.64,-1041.72 831.64,-1207.2 837.51,-1215.14 869.82,-1258.82 985.82,-1258.82 1001.49,-1258.82 1005.4,-1253.53 1032.32,-1217.12 1032.32,-1096 1032.32,-1079.45 1003.93,-1041.06
GND on Top Layer "Bottom Layer-No Net" (solid, remove dead copper, pour order 92): 127.5,-2733.94 401.08,-2733.94 407.48,-2742.54 417.55,-2756.04 417.55,-2775.69 417.55,-2824.8 422.12,-2830.94 451.4,-2870.23 528.26,-2870.23 540.16,-2870.23 554.8,-2889.86 559.37,-2895.99 559.37,-2977.04 559.37,-3155.07 554.79,-3161.21 365.39,-3161.21 294.94,-3161.21 126.59,-2935.3
+15V on Top Layer "Bottom Layer-No Net" (solid, remove dead copper, pour order 89): 194.27,-2352.76 195.21,-2353.81 195.21,-2401.34 195.21,-2417.18 204.69,-2427.74 212.27,-2436.19 291.88,-2436.19 436.87,-2436.19 460.57,-2409.78 467.19,-2402.4 538.27,-2402.4 549.64,-2402.4 558.17,-2411.9 560.07,-2414.01 560.07,-2538.61 560.07,-2646.31 543.96,-2664.26 518.37,-2692.77 196.16,-2692.77 111.82,-2692.77 85.28,-2663.2 54.96,-2629.41 54.96,-2350.66
GND on Top Layer "Bottom Layer-No Net" (solid, remove dead copper, pour order 106): 900.27,-2405.33 900.7,-2405.9 900.7,-2594.65 1081.72,-2594.65 1082.15,-2595.22 1080.87,-2593.52 1080.87,-2405.33
DM_IN on Top Layer "Top Layer-No Net" (solid, pour order 107): 130.78,-1834.97 521.99,-1834.97 521.09,-1835.57 521.09,-1999.76 131.69,-1999.76 130.78,-2000.36
PGND on Top Layer "Top Layer-No Net" (solid, remove dead copper, pour order 86): 1674.38,-885.58 1673.96,-886.02 1673.96,-938.86 1673.96,-948.91 1712.99,-989.96 1714.65,-991.7 1714.65,-1049.35 1714.65,-1055.65 1731.81,-1073.69 1879.29,-1073.69 1902.44,-1073.69 1917.28,-1058.08 1919.77,-1055.46 1919.77,-931.87 1919.77,-886.89 1918.52,-885.58
AI on Top Layer "Top Layer-No Net" (solid, remove dead copper, pour order 84): 1687.06,-602.61 1681.82,-607.85 1681.82,-762.43 1681.82,-781.65 1687.93,-787.76 1699.73,-799.55 1857.38,-799.55 1889.88,-799.55 1889.92,-799.52 1900.61,-788.82 1900.61,-715.71 1900.61,-608.72 1892.75,-600.85
BI on Top Layer "Top Layer-No Net" (solid, remove dead copper, pour order 83): 2780.41,-593.77 2783.65,-590.53 2960.49,-590.53 2985.88,-590.53 2990.56,-595.22 3000.33,-604.98 3000.33,-762.4 3000.33,-798.34 2995.25,-803.41 2994.86,-803.8 2767.13,-803.8 2767.13,-595.72 2769.09,-593.77
PGND on Top Layer "Top Layer-No Net" (solid, remove dead copper, pour order 81): 2747.44,-880.01 2734.41,-893.04 2734.41,-970.22 2734.41,-1044.38 2741.93,-1051.9 2759.46,-1069.43 2951.91,-1069.43 2990.01,-1069.43 3006.53,-1052.9 3006.53,-930.13 3006.53,-894.54 2991.5,-879.51
CI on Top Layer "Top Layer-No Net" (solid, remove dead copper, pour order 79): 3876.52,-598.22 3881.8,-592.94 4102.94,-592.94 4126.1,-592.94 4133.82,-600.66 4141.54,-608.38 4141.54,-727.6 4141.54,-800.5 4134.68,-807.36 4131.25,-803.93 3875.66,-803.93
PGND on Top Layer "Top Layer-No Net" (solid, remove dead copper, pour order 75): 3857.99,-881.27 4134.22,-881.27 4140.18,-887.7 4144.58,-892.43 4144.58,-935.36 4144.58,-1076.68 4143.64,-1077.69 4140.81,-1080.73 3910.41,-1080.73 3854.85,-1080.73 3851.08,-1076.68 3843.86,-1068.9 3843.86,-880.93
GND on Top Layer "Bottom Layer-No Net" (solid, remove dead copper, pour order 77): 405.44,-2733.95 551.08,-2733.95 558.52,-2741.39 559.63,-2742.5 559.63,-2904.86 449.66,-2904.86 383.16,-2838.35 380.93,-2836.13 380.93,-2733.58
+5V on Top Layer "Bottom Layer-No Net" (solid, remove dead copper, pour order 80): 973.77,-2845.79 973.77,-2849.6 948.67,-2874.7 946.49,-2876.88 946.49,-3007.81 946.49,-3045.99 936.67,-3055.81 935.58,-3056.9 854.3,-3056.9 852.66,-3056.9 834.66,-3074.9 818.3,-3091.27 818.3,-3155.64 818.3,-3182.35 810.1,-3190.55 806.82,-3193.83 693.37,-3193.83 658.48,-3193.83 651.92,-3187.27 643.18,-3178.54 643.18,-3020.9 643.18,-2907.96 613.19,-2877.96 607.71,-2872.49 607.71,-2753.58 761.55,-2753.58 762.1,-2754.13 769.74,-2761.77 769.74,-2826.69 774.65,-2826.69 797.02,-2849.06
+15V on Bottom Layer "Bottom Layer-No Net" (solid, remove dead copper, pour order 76): 1155.6,-1736.55 1272.58,-1736.55 1288.91,-1720.22 1300.66,-1708.47 1300.66,-1557.37 1300.66,-1507.49 1296.93,-1503.75 1292.05,-1498.88 1197.17,-1498.88 1162.2,-1498.88 1140.67,-1520.4 1136.66,-1524.41 1136.66,-1736.55
+48V on Bottom Layer "Bottom Layer-No Net" (solid, remove dead copper, pour order 90): 510.3,82.49 502.55,82.49 471.55,51.49 470,49.94 470,-284.83 470,-425.87 392.51,-503.37 153.02,-742.86 153.02,-822.39 153.02,-1076.02 170.87,-1093.87 175.52,-1098.52 510.3,-1098.52 708.68,-1098.52 728.83,-1078.37 753.63,-1053.58 753.63,-1014.83 753.63,-560.71 798.57,-515.77 801.68,-518.88 899.31,-518.88 1018.65,-518.88 1054.31,-483.21 1062.05,-475.47 1062.05,-273.99 1062.05,-198.04 1110.1,-150 1368.93,-150 1815.29,-150 1854.04,-188.74 1959.43,-294.13 1959.43,-363.88 2128.37,-363.88 2131.47,-360.78 2145.42,-346.83 2145.42,-255.39 2145.42,-229.04 2174.87,-199.59 2224.46,-150 2374.8,-150 2929.66,-150 2973.05,-193.39 3052.1,-272.44 3052.1,-342.18 3059.85,-342.18 3083.1,-365.43 3086.19,-368.53 3221.03,-368.53 3238.08,-368.53 3245.83,-360.78 3245.83,-281.74 3245.83,-202.69 3286.13,-162.39 3290.78,-157.74 3937.08,-157.74 3997.52,-157.74 4042.47,-202.69 4044.02,-201.14 4217.61,-201.14 4245.51,-201.14 4270.3,-225.94 4321.45,-277.09 4321.45,-304.98 4321.45,-340.63 4336.95,-356.13 4341.59,-360.77 4640.73,-360.77 4662.43,-360.77 4688.77,-334.43 4688.76,-334.42 4688.76,34.43 4688.76,67 4608.18,147.58
PGND on Bottom Layer "Top Layer-No Net" (solid, remove dead copper, pour order 109): 867.51,-1255.03 829.57,-1217.09 829.57,-1128.11 829.57,-808.36 850.08,-787.84 855.95,-781.98 1003.98,-781.98 1022.51,-781.98 1059.62,-819.09 1067.49,-826.96 1449.66,-826.96 1493.28,-826.96 1587.55,-732.69 1591.84,-728.4 2090.78,-728.4 2090.99,-728.4 2182.14,-819.55 2182.23,-819.64 2446.3,-819.64 2599.07,-819.64 2676.55,-742.16 2695.37,-723.34 3143.56,-723.34 3173.98,-723.34 3243.49,-792.84 3256.51,-805.87 3701.09,-805.87 3706.16,-805.87 3780.74,-731.3 3784.36,-727.68 4096.43,-727.68 4108.74,-727.68 4173.18,-663.24 4218.07,-618.35 4218.07,-540.15 4218.07,-514.08 4228.21,-503.94 4234,-498.15 4366.5,-498.15 4613.98,-498.15 4632.08,-516.25 4635.13,-519.3 4635.13,-918.11 4635.13,-1023.82 4620.65,-1038.3 4606.02,-1052.93 4067.23,-1052.93 1134.67,-1052.93 1093.52,-1094.08 1019.17,-1168.42 1019.17,-1239.48 1019.17,-1241.24 1005.38,-1255.03
GND on Bottom Layer "Top Layer-No Net" (solid, remove dead copper, pour order 87): 501.73,-1684.3 901.61,-2128.78 990.93,-2128.78 990.93,-1686.83 977.48,-1671.89
GND on Bottom Layer "Bottom Layer-No Net" (solid, remove dead copper, pour order 96): -117.12,-1188.76 -117.12,-1444.81 -89.07,-1471.14 214.38,-1755.91 1076.3,-1755.91 1080.12,-1755.91 1094.15,-1742.75 1092.87,-1741.55 1092.87,-1621.9 1092.87,-1448.4 1115.82,-1426.87 1027.84,-1344.31 809.82,-1344.31 781.77,-1344.31 696.34,-1264.14 646.61,-1217.47 609.64,-1217.47
GND on Bottom Layer "Bottom Layer-No Net" (solid, remove dead copper, pour order 94): 136.87,-1247.3 86.85,-1197.28 86.85,-1055.93 86.85,-590.56 159.69,-517.72 311.92,-365.49 311.92,-271.98 311.92,-229.58 277.13,-194.78 263,-180.65 82.5,-180.65 -12.09,-180.65 -87.12,-255.67 -119.74,-288.29 -119.74,-1248.39
AX on Bottom Layer "Bottom Layer-No Net" (solid, remove dead copper, pour order 100): 1160.61,-219.63 1129.04,-251.2 1129.04,-277.03 1129.04,-559.01 1093.88,-594.17 1061.59,-626.45 1061.59,-658.02 1061.59,-701.79 1067.33,-707.53 1107.51,-747.71 1388.77,-747.71 1479.18,-747.71 1497.83,-729.05 1503.57,-723.31 1503.57,-640.8 1503.57,-598.47 1517.19,-584.85 1527.24,-574.8 1604.01,-574.8 1652.8,-574.8 1682.23,-545.38 1687.97,-539.64 1687.97,-337.3 1687.97,-277.75 1680.07,-269.86 1662.85,-252.64 1489.22,-252.64 1456.93,-252.64 1423.21,-218.92
BX on Bottom Layer "Bottom Layer-No Net" (solid, remove dead copper, pour order 99): 2249.18,-218.02 2217.61,-249.59 2217.61,-275.42 2217.61,-557.39 2182.46,-592.55 2150.17,-624.84 2150.17,-656.41 2150.17,-700.18 2155.91,-705.91 2196.09,-746.09 2477.35,-746.09 2567.75,-746.09 2586.41,-727.44 2592.15,-721.7 2592.15,-639.19 2592.15,-596.85 2605.77,-583.23 2615.81,-573.19 2692.59,-573.19 2741.38,-573.19 2770.8,-543.76 2776.54,-538.02 2776.54,-335.69 2776.54,-276.14 2768.65,-268.24 2751.43,-251.02 2577.8,-251.02 2545.51,-251.02 2511.79,-217.3
CX on Bottom Layer "Bottom Layer-No Net" (solid, remove dead copper, pour order 98): 3349.09,-204.92 3317.52,-236.49 3317.52,-262.32 3317.52,-544.3 3282.37,-579.45 3250.08,-611.74 3250.08,-643.31 3250.08,-687.08 3255.82,-692.82 3296,-732.99 3577.26,-732.99 3667.66,-732.99 3686.32,-714.34 3692.06,-708.6 3692.06,-626.09 3692.06,-583.76 3705.68,-570.13 3715.72,-560.09 3792.5,-560.09 3841.29,-560.09 3870.71,-530.66 3876.45,-524.92 3876.45,-322.59 3876.45,-263.04 3868.56,-255.14 3851.34,-237.92 3677.71,-237.92 3645.42,-237.92 3611.7,-204.2
DM_IN on Bottom Layer "Top Layer-No Net" (solid, pour order 108): 132.2,-1839.85 132.58,-1840.1 519.08,-1840.1 519.08,-2000.89 518.7,-2001.15 132.2,-2001.15
GND on Bottom Layer "Top Layer-No Net" (solid, remove dead copper, pour order 88): 976.12,-1404.24 976.12,-1337.19 1032.41,-1245.37 1073.51,-1178.33 1186.1,-1178.33 3131.29,-1178.33 3175.96,-1251.2 3175.96,-1491.46 1121.01,-1491.46 1056.54,-1596.62
GND on Bottom Layer "Bottom Layer-No Net" (solid, remove dead copper, pour order 93): 173.48,-2598.58 151.78,-2620.28 151.78,-2889.96 151.78,-2893.06 281.97,-3023.25 514.46,-3255.75 2237.93,-3255.75 4596.88,-3255.75 5173.45,-2679.18 5195.14,-2657.48 5195.14,-1411.36 5195.14,-1329.69 5176.55,-1311.1 5168.53,-1303.08 4059.9,-1303.08 3907.49,-1303.08 3878.61,-1331.96 3872.2,-1338.37 3872.2,-1498.8 3872.2,-1540.52 3841.71,-1571.01 3755.07,-1657.65 2282.25,-1657.65 1919.66,-1657.65 1865.11,-1712.2 1781.69,-1795.61 1781.69,-2041.08 1781.69,-2532.54 1716.63,-2597.61
PGND on Bottom Solder "Top Layer-No Net" (solid): 878.3,-825.25 856.06,-847.49 856.06,-940.07 856.06,-1183.38 881.14,-1208.46 894.01,-1221.34 980.76,-1221.34 1012.62,-1221.34 1034.3,-1199.65 1059.49,-1174.47 1059.49,-1128.11 1059.49,-1068.74 1095.98,-1032.25 1100.16,-1028.07 2152.26,-1028.07 4553.06,-1028.07 4592.23,-988.89 4595.2,-985.92 4595.2,-686.16 4595.2,-545.58 4587.02,-537.4 4581.07,-531.45 4341.56,-531.45 4294.7,-531.45 4273.88,-552.27 4254.54,-571.61 4254.54,-610.29 4254.54,-633.35 4210.65,-677.23 4146.68,-741.2 4069.33,-741.2 4068.44,-741.2 3984.03,-825.61
+48V on Bottom Solder "Bottom Layer-No Net" (solid): 4231.46,-112.26 4271.65,-112.26 4345.78,-195.43 4401.21,-257.61 4641.64,-257.61 4663.81,-257.61 4687.37,-231.17 4694.99,-222.63 4694.99,-29.88 4694.99,38.52 4672.12,64.17 4657.06,81.07 4511.96,81.07
+48V on Bottom Solder "Top Layer-No Net" (solid): 548.11,47.29 548.11,-326.28 548.11,-364.03 305.69,-606.46 263.96,-648.19 263.96,-858.82 263.96,-1059.51 275.88,-1071.44 585.87,-1071.44 659.39,-1071.44 683.24,-1047.59 697.15,-1033.68 697.15,-771.39 697.15,-588.57 772.65,-513.07 800.47,-485.25 937.58,-485.25 967.39,-485.25 1011.1,-441.53 1030.97,-421.66 1030.97,-246.8 1030.97,-203.08 1080.65,-153.4 1104.5,-129.56 1923.17,-129.56 4528.23,-129.56 4544.13,-113.66 4567.98,-89.82 4567.98,35.37 4567.98,59.21 4548.11,79.08 4546.12,81.07 3182.98,81.07 561.89,81.07 548.02,67.21
AX on Bottom Solder "Top Layer-No Net" (solid): 1175.71,-240.45 1163.23,-252.92 1163.23,-280.37 1163.23,-566.11 1115.81,-613.52 1109.57,-619.76 1109.57,-694.63 1109.57,-712.1 1129.54,-732.06 1130.79,-733.31 1425.26,-733.31 1458.95,-733.31 1473.92,-718.34 1482.65,-709.6 1482.65,-609.78 1482.65,-581.08 1505.11,-558.62 1541.3,-522.44 1749.67,-522.44 1767.14,-522.44 1779.62,-509.96 1779.62,-386.43 1779.62,-320.3 1763.4,-304.08 1750.92,-291.6 1634.88,-291.6 1467.68,-291.6 1415.27,-239.2
BX on Bottom Solder "Top Layer-No Net" (solid): 2253.44,-232.18 2240.96,-244.66 2240.96,-272.11 2240.96,-557.84 2193.55,-605.26 2187.31,-611.5 2187.31,-686.36 2187.31,-703.83 2207.27,-723.8 2208.52,-725.04 2502.99,-725.04 2536.68,-725.04 2551.65,-710.07 2560.39,-701.34 2560.39,-601.52 2560.39,-572.82 2582.85,-550.36 2619.03,-514.17 2827.41,-514.17 2844.87,-514.17 2857.35,-501.69 2857.35,-378.17 2857.35,-312.04 2841.13,-295.82 2828.65,-283.34 2712.61,-283.34 2545.41,-283.34 2493.01,-230.93
CX on Bottom Solder "Top Layer-No Net" (solid): 3353.46,-227.78 3340.98,-240.26 3340.98,-267.71 3340.98,-553.45 3293.56,-600.86 3287.32,-607.1 3287.32,-681.97 3287.32,-699.44 3307.29,-719.4 3308.54,-720.65 3603.01,-720.65 3636.7,-720.65 3651.67,-705.68 3660.4,-696.94 3660.4,-597.12 3660.4,-568.42 3682.86,-545.96 3719.05,-509.78 3927.42,-509.78 3944.89,-509.78 3957.37,-497.3 3957.37,-373.77 3957.37,-307.64 3941.15,-291.42 3928.67,-278.94 3812.63,-278.94 3645.43,-278.94 3593.02,-226.54

## Keep-outs
Keep-Out Layer:
  the board outline again, w5

## Silkscreen, mask and mechanical layers (free items; w line width, h text height)
Top Overlay:
  drawing of 460 lines, arcs and shapes, not listed
  text "137MM" at 2439.73,223.12 h30
  text "LKS_DEMO_V5.0_20200620" at 3189.3,-29.43 h40
  text "48V" at 1091.56,-33.19 h40
  text "HALL" at 4813.98,-118.06 h40
  text "V" at 2383.75,-147.29 h100
  text "W" at 3464.34,-147.29 h100
  text "U" at 1244.36,-155.11 h100
  text "5VH" at 5095.07,-254.69 h40
  text "U" at 5124.52,-358.34 h40
  text "V" at 5125.13,-458.67 h40
  text "W" at 5129.41,-557.44 h40
  text "GND" at 5095.96,-657.17 h40
  text "RX0" at 5107.14,-942.41 h40
  text "PGND" at 4270.43,-961.6 h30
  text "TX0" at 5105,-1040.19 h40
  text "+48V" at 29.18,-1084.28 h80 r90
  text "GND" at 5103.92,-1140.09 h40
  text "GND" at 4120.67,-1250 h40
  text "R4" at 4733.7,-1383.1 h40
  text "GND" at 19.26,-1542.46 h80 r90
  text "85" at -230.96,-1738.43 h30 r90
  text "STOP" at 4687.64,-1887.39 h40
  text "POWER" at -51.05,-1924.69 h40 r90
  text "15V" at -74.39,-2418.01 h40
  text "START" at 4684.68,-2429.45 h40
  text "5V" at 1402.31,-2579.92 h40
  text "5V" at -41.77,-2649.09 h40
  text "5V" at 1404.11,-2673.72 h40
  text "5V" at 1720.37,-2679.13 h40
  text "P5、P6、P7跳帽说明：" at 1843.69,-2905.51 h100
  text "跳帽连接右端是三电阻采样" at 1838.89,-2995.03 h100
  text "GND" at 4725.8,-3036.04 h40
  text "跳帽连接左端是三相MOS内阻采样" at 1838.08,-3081.1 h100
  text "GND" at 194.74,-3130.2 h40
  text "20200430" at 3464.56,-3332.28 h60
Bottom Overlay:
  drawing of 452 lines, arcs and shapes, not listed
Top Solder:
  circle w78.74: c-8.21,-3104.1 r17.13
  circle w78.74: c5188.98,-7.92 r17.13
  circle w78.74: c5128.7,-3120.51 r17.13

## Text inside footprints (layer, text, board x,y; h text height)
1: Top Overlay "LINKO SEMICONDUCTOR" at 3820.33,-1946.23 h78.74; Top Overlay "凌鸥创芯" at 3815.33,-1841.23 h196.85
P1: Top Overlay "1" at 3512.25,-1661.82 h30 r270; Top Overlay "15" at 3617.25,-1616.82 h30 r270; Top Overlay "14" at 3517.25,-3116.82 h30 r270; Top Overlay "28" at 3617.25,-3116.82 h30 r270
P2: Top Overlay "28" at 1617.25,-3116.82 h30 r270; Top Overlay "14" at 1517.25,-3116.82 h30 r270; Top Overlay "15" at 1617.25,-1616.82 h30 r270; Top Overlay "1" at 1512.25,-1661.82 h30 r270